# EAGLE board C2 (EAGLE 7.5.0)
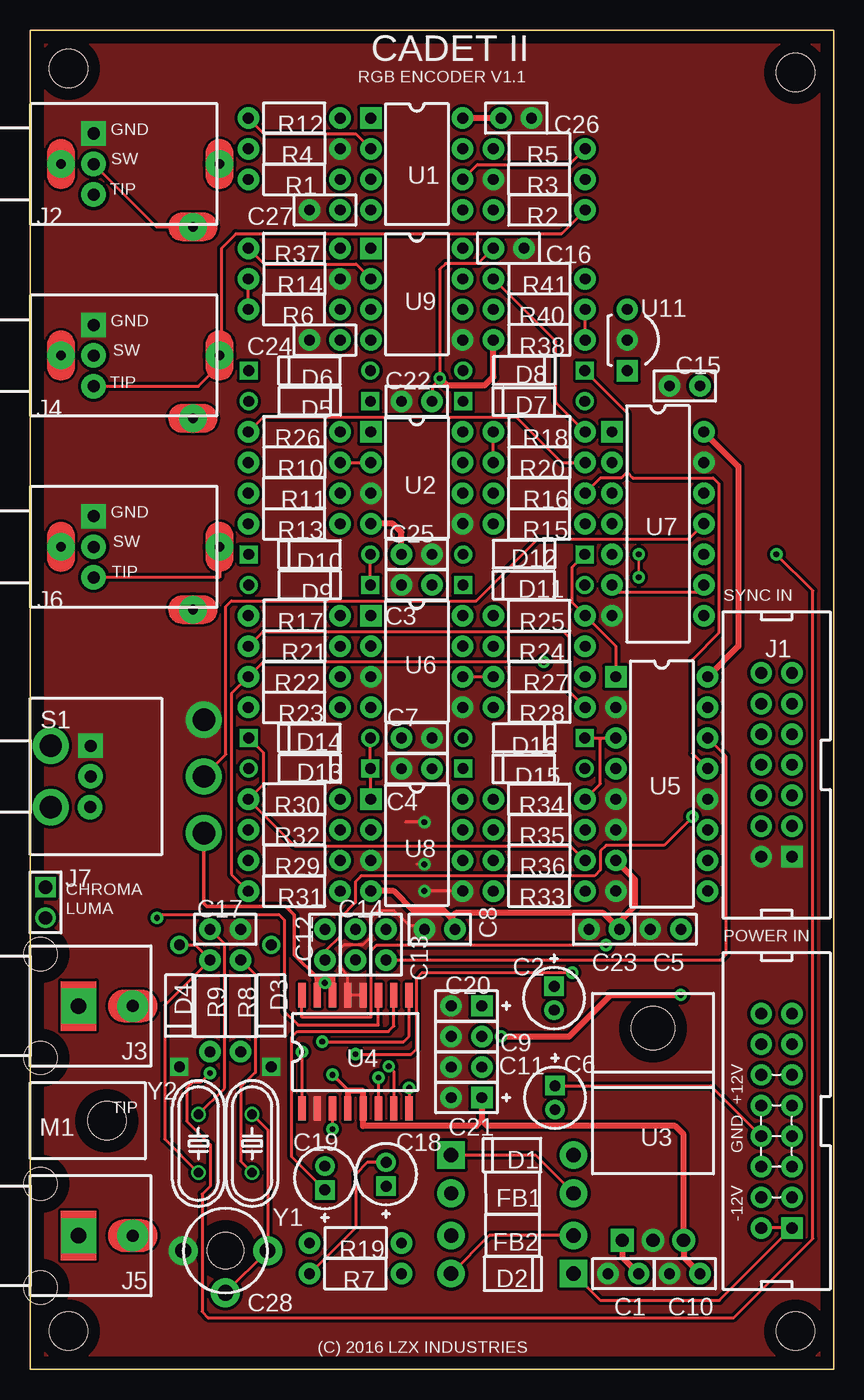
[diagram p0: board, top side]
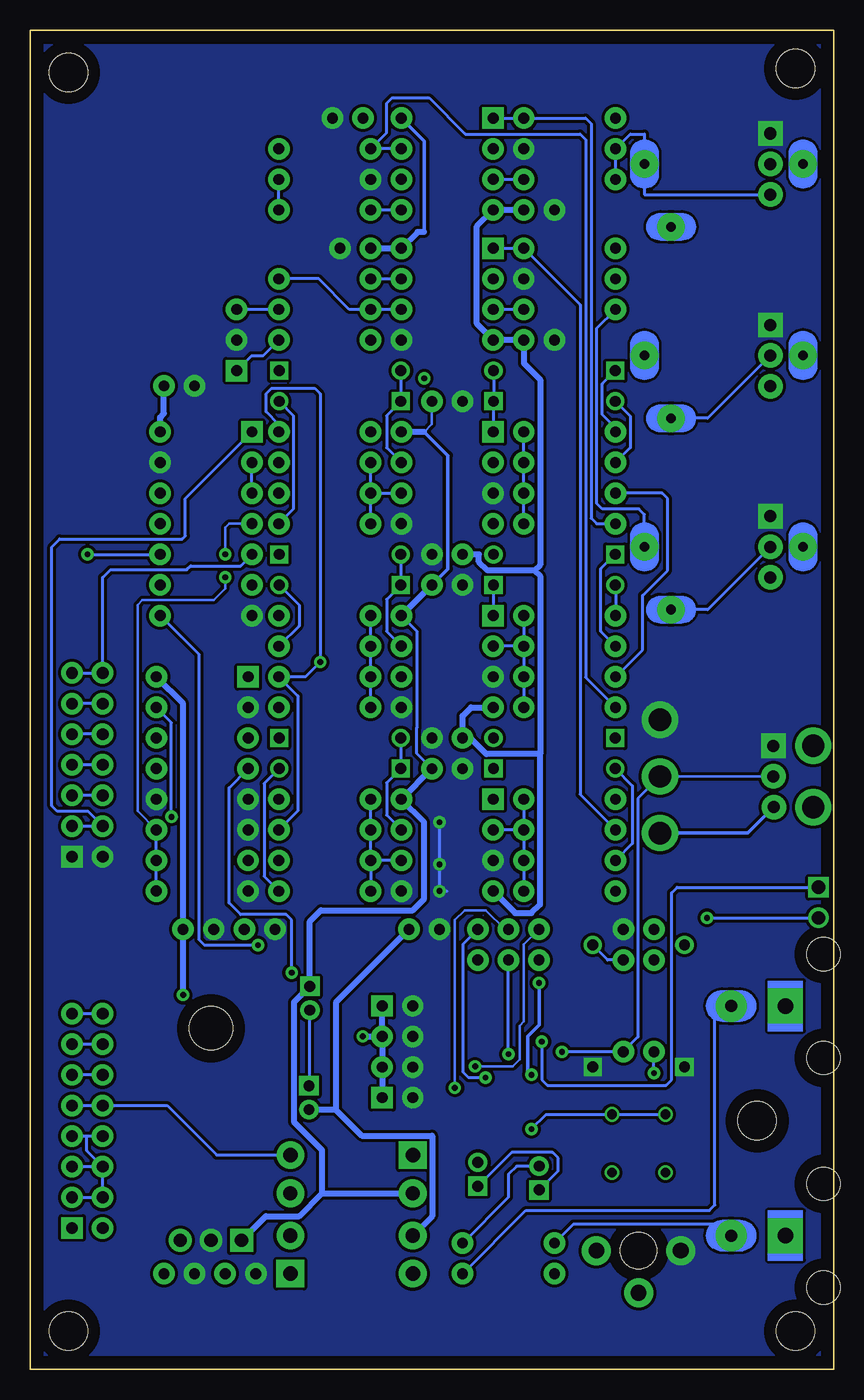
[diagram p1: board, bottom side, seen from below]

Size 66.66 x 111.12 mm. Coordinates in mm from the lower left corner, seen from the top.
Outline: 0,0 66.66,0 66.66,111.12 0,111.12 0,0
Copper layers (1*16): Top 0.035mm / dielectric 1.5mm / Bottom 0.035mm
Design rules "default *": minimum track width 10mil, minimum drill 0.61mm, track to track 8mil, track to pad 8mil, pad to pad 8mil, via to via 8mil, smd to smd 8mil, copper to edge 40mil, drill to drill 8mil, minimum pad ring 0mil, minimum via ring 8mil, stop-mask expansion 2mil, vias tented up to drill 19mil, thermal gap 10mil
Net classes: 0 Default: width 0.229 mm; 1 Power Rails: width 0.305 mm, clearance 0.178 mm, clearance 0.178 mm to class 0
Holes 3.17 mm at 3.18,3.17 3.18,107.95 63.49,3.17 63.49,107.62

## Footprints (pad centres in the part's own frame; a part is rotated, then mirrored left to right if it is on the bottom)
CAP-2.54/6.6x3 = drill 0.889 pad 1.778: 1 -1.27,0; 2 1.27,0
CAPPR-2/5.08 = drill 0.9 pad 1.6 square: 1 -0.991,0 | drill 0.9 pad 1.6: 2 0.991,0
CAP-2.54/6.6x3_C3 = drill 0.889 pad 1.778: 1 -1.27,0; 2 1.27,0
CAPPR-2/5.08_C6 = drill 0.9 pad 1.6 square: 1 -0.991,0 | drill 0.9 pad 1.6: 2 0.991,0
CAP-2.54/6.6x3_C7 = drill 0.889 pad 1.778: 1 -1.27,0; 2 1.27,0
CAP-2.54/6.6x3_C8 = drill 0.889 pad 1.778: 1 -1.27,0; 2 1.27,0
CAP-2.54/6.6x3_C9 = drill 0.889 pad 1.778: 1 -1.27,0; 2 1.27,0
CAP-2.54/6.6x3_C11 = drill 0.889 pad 1.778: 1 -1.27,0; 2 1.27,0
CAP-2.54/6.6x3_C12 = drill 0.889 pad 1.778: 1 -1.27,0; 2 1.27,0
CAP-2.54/6.6x3_C13 = drill 0.889 pad 1.778: 1 -1.27,0; 2 1.27,0
CAP-2.54/6.6x3_C14 = drill 0.889 pad 1.778: 1 -1.27,0; 2 1.27,0
CAP-2.54/6.6x3_C15 = drill 0.889 pad 1.778: 1 -1.27,0; 2 1.27,0
CAP-2.54/6.6x3_C16 = drill 0.889 pad 1.778: 1 -1.27,0; 2 1.27,0
CAP-2.54/6.6x3_C17 = drill 0.889 pad 1.778: 1 -1.27,0; 2 1.27,0
CAPPR-2/5.08_C18 = drill 0.9 pad 1.6 square: 1 -0.991,0 | drill 0.9 pad 1.6: 2 0.991,0
CAPPR-2/5.08_C19 = drill 0.9 pad 1.6 square: 1 -0.991,0 | drill 0.9 pad 1.6: 2 0.991,0
PCAP-2.54/6.6x3 = drill 0.889 pad 1.778 square: 1 -1.27,0 | drill 0.889 pad 1.778: 2 1.27,0
PCAP-2.54/6.6x3_C21 = drill 0.889 pad 1.778 square: 1 -1.27,0 | drill 0.889 pad 1.778: 2 1.27,0
CAP-2.54/6.6x3_C22 = drill 0.889 pad 1.778: 1 -1.27,0; 2 1.27,0
CAP-2.54/6.6x3_C23 = drill 0.889 pad 1.778: 1 -1.27,0; 2 1.27,0
CAP-2.54/6.6x3_C24 = drill 0.889 pad 1.778: 1 -1.27,0; 2 1.27,0
GYA22000 = drill 1.3 pad 2.4: CCW 0,3.5; CW 0,-3.5; W 3.5,0 | hole 3: 0,0
DO-41 = drill 1.2 pad 2.286 square: 1 -5.08,0 | drill 1.2 pad 2.286: 2 5.08,0
DO-41_D2 = drill 1.2 pad 2.286 square: 1 -5.08,0 | drill 1.2 pad 2.286: 2 5.08,0
DO-35 = drill 0.9 pad 1.5 square: 1 -5.05,0 | drill 0.9 pad 1.5: 2 5.05,0
DO-35_D5 = drill 0.9 pad 1.5 square: 1 -5.05,0 | drill 0.9 pad 1.5: 2 5.05,0
FB-10.16/4.45x3.5 = drill 1.194 pad 2.286: 1 -5.08,0; 2 5.08,0
IDC14M = drill 0.965 pad 1.778 square: 1 7.62,1.27 | drill 0.965 pad 1.778: 2 7.62,-1.27; 3 5.08,1.27; 4 5.08,-1.27; 5 2.54,1.27; 6 2.54,-1.27; 7 0,1.27; 8 0,-1.27; 9 -2.54,1.27; 10 -2.54,-1.27; 11 -5.08,1.27; 12 -5.08,-1.27; 13 -7.62,1.27; 14 -7.62,-1.27
PJ302M = drill 0.8 pad 2.286: 1A 2.54,0; 2A 13.487,-5.207; 3A 15.697,0 | drill 1 pad 2.032 square: 1B 5.258,2.54 | drill 1 pad 2.032: 2B 5.258,0; 3B 5.258,-2.54
RCJ-04X = drill 1.3 pad 2.9 square: 1 0,4 | drill 1 pad 2.6: 2 0,8.5 | hole 2.75: 4.3,0.85; -4.3,0.85
HDR-2x1T/2.54x2.54/3x5 = drill 1.1 pad 1.7 square: 1 0,-1.27 | drill 1.1 pad 1.7: 2 0,1.27
IDC16M = drill 0.965 pad 1.778 square: 1 8.89,1.27 | drill 0.965 pad 1.778: 2 8.89,-1.27; 3 6.35,1.27; 4 6.35,-1.27; 5 3.81,1.27; 6 3.81,-1.27; 7 1.27,1.27; 8 1.27,-1.27; 9 -1.27,1.27; 10 -1.27,-1.27; 11 -3.81,1.27; 12 -3.81,-1.27; 13 -6.35,1.27; 14 -6.35,-1.27; 15 -8.89,1.27; 16 -8.89,-1.27
KEYSTONE621 = hole 3.175: 0,6.35
RES-7.62/5.1x2.5 = drill 0.889 pad 1.778: 1 -3.81,0; 2 3.81,0
RES-7.62/5.1x2.5_R2 = drill 0.889 pad 1.778: 1 -3.81,0; 2 3.81,0
RES-7.62/5.1x2.5_R16 = drill 0.9 pad 1.778: 1 -3.81,0; 2 3.81,0
10TF230-DIY = drill 1.85 pad 3: 1 -4.7,14.4; 2 0,14.4; 3 4.7,14.4; A -2.55,1.7; B 2.55,1.7 | drill 1 pad 2.032 square: 1B -2.54,5 | drill 1 pad 2.032: 2B 0,5; 3B 2.54,4.964
DIP-8 = drill 0.9 pad 1.778 square: 1 -3.81,3.81 | drill 0.9 pad 1.778: 2 -3.81,1.27; 3 -3.81,-1.27; 4 -3.81,-3.81; 5 3.81,-3.81; 6 3.81,-1.27; 7 3.81,1.27; 8 3.81,3.81
TO-220H = drill 1.1 pad 1.9 square: 1 -2.54,0 | drill 1.1 pad 1.9: 2 0,0; 3 2.54,0 | hole 3.6: 0,17.6
SOIC-16/300mil = smd 2 x 0.6: 1 -4.7,4.445; 2 -4.7,3.175; 3 -4.7,1.905; 4 -4.7,0.635; 5 -4.7,-0.635; 6 -4.7,-1.905; 7 -4.7,-3.175; 8 -4.7,-4.445; 9 4.7,-4.445; 10 4.7,-3.175; 11 4.7,-1.905; 12 4.7,-0.635; 13 4.7,0.635; 14 4.7,1.905; 15 4.7,3.175; 16 4.7,4.445
DIP-16 = drill 0.9 pad 1.778 square: 1 -3.81,8.89 | drill 0.9 pad 1.778: 2 -3.81,6.35; 3 -3.81,3.81; 4 -3.81,1.27; 5 -3.81,-1.27; 6 -3.81,-3.81; 7 -3.81,-6.35; 8 -3.81,-8.89; 9 3.81,-8.89; 10 3.81,-6.35; 11 3.81,-3.81; 12 3.81,-1.27; 13 3.81,1.27; 14 3.81,3.81; 15 3.81,6.35; 16 3.81,8.89
DIP-8_U6 = drill 0.9 pad 1.778 square: 1 -3.81,3.81 | drill 0.9 pad 1.778: 2 -3.81,1.27; 3 -3.81,-1.27; 4 -3.81,-3.81; 5 3.81,-3.81; 6 3.81,-1.27; 7 3.81,1.27; 8 3.81,3.81
DIP-14 = drill 0.9 pad 1.778 square: 1 -3.81,7.62 | drill 0.9 pad 1.778: 2 -3.81,5.08; 3 -3.81,2.54; 4 -3.81,0; 5 -3.81,-2.54; 6 -3.81,-5.08; 7 -3.81,-7.62; 8 3.81,-7.62; 9 3.81,-5.08; 10 3.81,-2.54; 11 3.81,0; 12 3.81,2.54; 13 3.81,5.08; 14 3.81,7.62
TO-92-100R = drill 0.889 pad 1.778 square: 1 2.54,0 | drill 0.889 pad 1.778: 2 0,0; 3 -2.54,0
HC-49U = drill 0.813 pad 1.219: 1 -2.413,0; 2 2.413,0
HC-49U_Y2 = drill 0.813 pad 1.219: 1 -2.413,0; 2 2.413,0

## Placement (x,y rotation side)
C1  330n  [CAP-2.54/6.6x3]  49.21,7.94 180 top
C2  10u 25V  [CAPPR-2/5.08]  43.46,30.8 270 top
C3  100n  [CAP-2.54/6.6x3_C3]  32.07,65.09 180 top
C4  100n  [CAP-2.54/6.6x3_C3]  32.07,49.85 180 top
C5  100n  [CAP-2.54/6.6x3]  52.71,36.51 180 top
C6  10u 25V  [CAPPR-2/5.08_C6]  43.54,22.54 270 top
C7  100n  [CAP-2.54/6.6x3_C7]  32.07,52.39 180 top
C8  100n  [CAP-2.54/6.6x3_C8]  33.97,36.51 0 top
C9  1u  [CAP-2.54/6.6x3_C9]  36.2,27.62 180 top
C10  100n  [CAP-2.54/6.6x3]  54.29,7.94 180 top
C11  1u  [CAP-2.54/6.6x3_C11]  36.2,25.08 180 top
C12  100n  [CAP-2.54/6.6x3_C12]  24.45,35.24 90 top
C13  100n  [CAP-2.54/6.6x3_C13]  29.53,35.24 90 top
C14  100n  [CAP-2.54/6.6x3_C14]  26.99,35.24 90 top
C15  100n  [CAP-2.54/6.6x3_C15]  54.29,81.6 180 top
C16  100n  [CAP-2.54/6.6x3_C16]  39.69,93.03 0 top
C17  DNP  [CAP-2.54/6.6x3_C17]  16.19,36.51 0 top
C18  220uF 6.3V  [CAPPR-2/5.08_C18]  29.53,16.19 90 top
C19  220uF 6.3V  [CAPPR-2/5.08_C19]  24.45,15.87 90 top
C20  10u Tantalum  [PCAP-2.54/6.6x3]  36.2,30.16 180 top
C21  10u Tantalum  [PCAP-2.54/6.6x3_C21]  36.2,22.54 180 top
C22  100n  [CAP-2.54/6.6x3_C22]  32.07,80.33 180 top
C23  100n  [CAP-2.54/6.6x3_C23]  47.63,36.51 0 top
C24  100n  [CAP-2.54/6.6x3_C24]  24.45,85.41 0 top
C25  100n  [CAP-2.54/6.6x3_C22]  32.07,67.63 180 top
C26  100n  [CAP-2.54/6.6x3_C16]  40.32,103.82 0 top
C27  100n  [CAP-2.54/6.6x3_C24]  24.45,96.2 0 top
C28  DNP  [GYA22000]  16.19,9.85 270 top
D1  1N4001  [DO-41]  40.01,17.78 0 top
D2  1N4001  [DO-41_D2]  40.01,7.94 180 top
D3  1N4148  [DO-35]  20,30.16 90 top
D4  1N4148  [DO-35]  12.38,30.16 90 top
D5  1N5711  [DO-35_D5]  23.18,80.33 180 top
D6  1N5711  [DO-35]  23.18,82.87 0 top
D7  1N5711  [DO-35]  40.96,80.33 0 top
D8  1N5711  [DO-35_D5]  40.96,82.87 180 top
D9  1N5711  [DO-35_D5]  23.18,65.09 180 top
D10  1N5711  [DO-35]  23.18,67.63 0 top
D11  1N5711  [DO-35]  40.96,65.09 0 top
D12  1N5711  [DO-35_D5]  40.96,67.63 180 top
D13  1N5711  [DO-35_D5]  23.18,49.85 180 top
D14  1N5711  [DO-35]  23.18,52.39 0 top
D15  1N5711  [DO-35]  40.96,49.85 0 top
D16  1N5711  [DO-35_D5]  40.96,52.39 180 top
FB1  68R  [FB-10.16/4.45x3.5]  40.01,14.61 180 top
FB2  68R  [FB-10.16/4.45x3.5]  40.01,11.11 180 top
J1  LZXSYNC14  [IDC14M]  61.91,50.16 270 top
J2  3.5MM JACK  [PJ302M]  0.01,100.01 0 top
J3  RCJ-04X  [RCJ-04X]  0.01,30.15 270 top
J4  3.5MM JACK  [PJ302M]  0.01,84.12 0 top
J5  RCJ-04X  [RCJ-04X]  0.01,11.1 270 top
J6  3.5MM JACK  [PJ302M]  0.01,68.25 0 top
J7  1X2 PIN HEADER  [HDR-2x1T/2.54x2.54/3x5]  1.27,38.73 180 top
J9  2X8 PIN HEADER  [IDC16M]  61.91,20.62 270 top
M1  KEYSTONE621  [KEYSTONE621]  0.01,20.62 270 top
R1  499R  [RES-7.62/5.1x2.5]  21.91,98.74 0 top
R2  499R  [RES-7.62/5.1x2.5_R2]  42.23,96.2 180 top
R3  100K  [RES-7.62/5.1x2.5]  42.23,98.74 0 top
R4  100K  [RES-7.62/5.1x2.5_R2]  21.91,101.28 180 top
R5  1K  [RES-7.62/5.1x2.5_R2]  42.23,101.28 180 top
R6  499R  [RES-7.62/5.1x2.5]  21.91,87.95 0 top
R7  75R  [RES-7.62/5.1x2.5]  26.99,7.94 0 top
R8  10K  [RES-7.62/5.1x2.5_R2]  17.46,30.16 270 top
R9  10K  [RES-7.62/5.1x2.5_R2]  14.92,30.16 270 top
R10  1K  [RES-7.62/5.1x2.5_R2]  21.91,75.25 180 top
R11  1K  [RES-7.62/5.1x2.5]  21.91,72.71 0 top
R12  1K  [RES-7.62/5.1x2.5]  21.91,103.82 0 top
R13  1.4K  [RES-7.62/5.1x2.5]  21.91,70.17 0 top
R14  100K  [RES-7.62/5.1x2.5_R2]  21.91,90.49 180 top
R15  1K  [RES-7.62/5.1x2.5]  42.23,70.17 0 top
R16  1K  [RES-7.62/5.1x2.5_R16]  42.23,72.71 0 top
R17  1K  [RES-7.62/5.1x2.5_R2]  21.91,62.55 180 top
R18  1K  [RES-7.62/5.1x2.5_R2]  42.23,77.79 180 top
R19  75R  [RES-7.62/5.1x2.5_R2]  26.99,10.48 180 top
R20  1K  [RES-7.62/5.1x2.5_R2]  42.23,75.25 180 top
R21  1K  [RES-7.62/5.1x2.5_R2]  21.91,60.01 180 top
R22  1K  [RES-7.62/5.1x2.5]  21.91,57.47 0 top
R23  1.4K  [RES-7.62/5.1x2.5]  21.91,54.93 0 top
R24  1K  [RES-7.62/5.1x2.5]  42.23,60.01 0 top
R25  1K  [RES-7.62/5.1x2.5]  42.23,62.55 0 top
R26  1K  [RES-7.62/5.1x2.5_R2]  21.91,77.79 180 top
R27  1K  [RES-7.62/5.1x2.5_R2]  42.23,57.47 180 top
R28  1K  [RES-7.62/5.1x2.5_R2]  42.23,54.93 180 top
R29  1K  [RES-7.62/5.1x2.5_R2]  21.91,42.23 180 top
R30  1K  [RES-7.62/5.1x2.5_R2]  21.91,47.31 180 top
R31  1K  [RES-7.62/5.1x2.5]  21.91,39.69 0 top
R32  1.4K  [RES-7.62/5.1x2.5]  21.91,44.77 0 top
R33  1K  [RES-7.62/5.1x2.5]  42.23,39.69 0 top
R34  1K  [RES-7.62/5.1x2.5]  42.23,47.31 0 top
R35  1K  [RES-7.62/5.1x2.5_R2]  42.23,44.77 180 top
R36  1K  [RES-7.62/5.1x2.5_R2]  42.23,42.23 180 top
R37  1K  [RES-7.62/5.1x2.5]  21.91,93.03 0 top
R38  4.99K  [RES-7.62/5.1x2.5_R2]  42.23,85.41 180 top
R40  3.48K  [RES-7.62/5.1x2.5_R2]  42.23,87.95 180 top
R41  1K  [RES-7.62/5.1x2.5_R2]  42.23,90.49 180 top
S1  10TF230-DIY  [10TF230-DIY]  0.01,49.2 270 top
U1  LM6172  [DIP-8]  32.07,100.01 0 top
U2  LM6172  [DIP-8]  32.07,73.98 0 top
U3  7805  [TO-220H]  51.66,10.7 0 top
U4  AD724  [SOIC-16/300mil]  26.99,26.35 90 top
U5  CD4053  [DIP-16]  52.39,48.58 0 top
U6  LM6172  [DIP-8_U6]  32.07,58.74 0 top
U7  74HC14  [DIP-14]  52.07,70.17 0 top
U8  LM6172  [DIP-8_U6]  32.07,43.5 0 top
U9  LM6172  [DIP-8_U6]  32.07,89.22 0 top
U11  TL431  [TO-92-100R]  49.53,85.41 270 top
Y1  3.58MHz  [HC-49U]  18.41,18.74 90 top
Y2  4.43MHz  [HC-49U_Y2]  13.96,18.74 90 top

## Library data of the parts
C1-C28 D1 D2 J1 J3 J5 J9 M1 R1-R38 R40 R41 S1 = common
D3-D16 = common; DATASHEET: http://datasheets.diptrace.com\fairchild\1N4148.pdf; MANUFACTURER: Fairchild
FB1 FB2 = common; MANUFACTURER: Fair-Rite
J2 J4 J6 = common; DATASHEET: http://www.thonk.co.uk/shop/pj302m/
J7 = common; DATASHEET: http://datasheets.diptrace.com\con_headers\901310126_sd.pdf; MANUFACTURER: Molex
U1 U2 U6 U8 U9 = common; DATASHEET: http://datasheets.diptrace.com\ti\TL07x.pdf; MANUFACTURER: Texas Instruments
U3 = common; MANUFACTURER: Atmel
U4 = common; DATASHEET: http://datasheets.diptrace.com\analog_devices\AD724.pdf; MANUFACTURER: Analog Devices
U5 = common; DATASHEET: http://datasheets.diptrace.com\fairchild\CD4051BC.pdf; MANUFACTURER: Fairchild
U7 = common; MANUFACTURER: National Semiconductor
U11 = common; DATASHEET: http://datasheets.diptrace.com\st_micro\CD00000986.pdf; MANUFACTURER: ST Microelectronics
Y1 Y2 = common; DATASHEET: http://datasheets.diptrace.com\crystals\ECS-HC49U.pdf

## Nets
0V: C2.2 C6.1 J9.3 J9.4 J9.5 J9.6 J9.7 J9.8
+5V [Power Rails]: C5.1 C9.1 C10.1 C11.1 C15.1 C20.1 C21.1 S1.3 S1.3B U3.3 U4.4 U4.5 U4.14 U4.15 U5.16 U7.14
+12V [Power Rails]: C1.1 C2.1 C3.1 C4.1 C16.1 C22.1 C26.1 FB1.2 R38.2 U1.8 U2.8 U3.1 U6.8 U8.8 U9.8
-12V [Power Rails]: C6.2 C7.2 C8.2 C23.2 C24.2 C25.2 C27.2 FB2.2 U1.4 U2.4 U5.7 U6.4 U8.4 U9.4
BLANKING: U5.9 U5.10 U5.11 U7.4
BLUE_BLANKING: D16.1 R34.2 U5.3
CLIP_REF: R11.1 R18.1 R22.1 R27.1 R31.1 R35.1 R41.2 U9.7
CSYNC: U4.16 U7.8
GREEN_BLANKING: D12.1 R25.2 U5.1
Net_0: J5.2 R19.2
Net_1: D2.2 FB2.1
Net_2: D1.1 FB1.1
Net_3: R5.1 U1.6
Net_4: J1.13 J1.14 U7.5
Net_5: D2.1 J9.1 J9.2
Net_6: J4.3A J4.3B R2.1 R3.2
Net_7: C12.2 U4.7
Net_8: U7.6 U7.9
Net_9: J2.3A J2.3B R1.1 R4.2
Net_10: C18.1 C19.1 U4.10
Net_11: C14.1 U5.4
Net_12: R2.2 U1.5
Net_13: R12.2 R13.1 U1.1
Net_14: R24.1 R25.1 R27.2 R28.2 U6.6
Net_15: C14.2 U4.8
Net_16: R15.1 R16.1 R18.2 R20.2 U2.6
Net_17: D7.1 D8.2 U2.7
Net_18: C13.2 U4.6
Net_19: D7.2 R15.2
Net_20: D11.1 D12.2 U6.7
Net_21: R10.1 R11.2 R13.2 R26.1 U2.2
Net_22: D5.1 D6.2 U2.1
Net_23: D11.2 R24.2
Net_24: R17.1 R21.1 R22.2 R23.2 U6.2
Net_25: D9.1 D10.2 U6.1
Net_26: D9.2 R17.2
Net_27: D10.1 R21.2 R28.1
Net_28: J3.2 R7.2
Net_29: R33.1 R34.1 R35.2 R36.2 U8.6
Net_30: D15.1 D16.2 U8.7
Net_31: D15.2 R33.2
Net_32: R29.1 R30.1 R31.2 R32.2 U8.2
Net_33: D1.2 J9.9 J9.10
Net_34: D13.1 D14.2 U8.1
Net_35: D3.2 R8.1 Y1.1
Net_36: D13.2 R29.2
Net_37: D4.2 R9.1 Y2.1
Net_38: C17.1 C28.CCW C28.W U4.3 Y1.2 Y2.2
Net_39: R8.2 S1.2 S1.2B U4.1 U7.11
Net_40: R9.2 U7.10
Net_41: C12.1 U5.15
Net_42: C13.1 U5.14
Net_43: C19.2 R19.1
Net_44: C18.2 R7.1
Net_45: D5.2 R10.2
Net_46: D6.1 R20.1 R26.2
Net_47: J1.3 J1.4 U7.1
Net_48: U7.2 U7.3
Net_49: D14.1 R30.2 R36.1
Net_50: R1.2 U1.3
Net_52: R12.1 U1.2
Net_53: C1.2 C3.2 C4.2 C5.2 C7.1 C8.1 C9.2 C10.2 C11.2 C15.2 C16.2 C17.2 C20.2 C21.2 C22.2 C23.1 C24.1 C25.1 C26.2 C27.1 C28.CW D3.1 D4.1 J1.1 J1.2 J2.1A J2.1B J3.1 J4.1A J4.1B J5.1 J6.1A J6.1B R3.1 R4.1 R14.1 S1.1 S1.1B U2.3 U2.5 U3.2 U4.2 U4.12 U4.13 U5.2 U5.5 U5.6 U5.8 U5.12 U6.3 U6.5 U7.7 U7.13 U8.3 U8.5 U9.5 U11.2
Net_54: J6.3A J6.3B R6.1 R14.2
Net_61: R5.2 R23.1 U1.7
Net_62: R6.2 U9.3
Net_64: R37.1 U9.2
Net_65: R32.1 R37.2 U9.1
Net_67: R38.1 R40.1 U11.1 U11.3
Net_68: R40.2 R41.1 U9.6
Net_70: J7.1 U4.9
Net_71: J7.2 U4.11
Net_72: J1.7 J1.8
Net_73: J1.9 J1.10
Net_74: J1.11 J1.12
Net_75: J1.5 J1.6
Net_76: J2.2A J2.2B
Net_77: J4.2A J4.2B
Net_78: J6.2A J6.2B
Net_79: J9.11 J9.12
Net_80: J9.13 J9.14
Net_81: J9.15 J9.16
RED_BLANKING: D8.1 R16.2 U5.13

## Tracks (layer width: path | path; a pad name or v marks a point on that pad's centre or on a via)
0V
  Top 0.254: C6.1 56.46,23.53 J9.8
  Bottom 0.254: J9.3 J9.4 J9.6 | J9.6 61.96,18.14 61.96,19.35 | 61.96,19.35 J9.7 | J9.6 J9.5 | J9.8 61.96,19.35 | C6.1 43.46,23.61 C2.2
+5V  (via drill 0.48 pad 1.02)
  Top 0.305: S1.3 14.41,38.67 14.67,38.42 21.2,38.42 21.91,37.71 21.91,34.41 23.81,32.51 | U4.4 26.35,23.18 v25.08,24.45 | v24.45,32.07 24.45,32.36 24.3,32.51
  Top 0.508: C10.1 54.2,9.3 U3.3 54.2,19.48 53.49,20.19 37.92,20.19 37.47,20.65 | 37.47,20.65 37.01,20.19 27.62,20.19 U4.5 27.62,23.11 26.35,23.11 U4.4 | U7.14 58.74,74.93 58.74,60.01 U5.16 | v39.07,27.62 44.72,27.62 48.16,31.06 v53.98,31.06 | C21.1 37.47,20.65 | U4.14 25.08,32.51 24.3,32.51 23.81,32.51 U4.15
  Bottom 0.305: S1.3 7.14,44.5 S1.3B | v25.08,24.45 25.4,24.76 25.4,27.62 24.45,28.57 v24.45,32.07
  Bottom 0.508: v39.07,27.62 C9.1 | v53.98,31.06 C5.1 53.98,55.24 U5.16 | U7.14 55.88,79 55.56,79.31 C15.1 | C9.1 C20.1 | C21.1 C11.1 C9.1
+12V  (via drill 0.48 pad 1.02)
  Top 0.229: C16.1 37.15,91.76 34.46,91.76 33.97,91.28 v33.97,82.23
  Top 0.254: v33.97,82.23 33.97,82.18 33.34,81.55 C22.1
  Top 0.508: U3.1 49.12,9.3 C1.1 | C26.1 U1.8 | U1.8 | v33.97,82.23 34.55,81.66 37.71,81.66 38.42,82.37 R38.2
  Bottom 0.203: C22.1 33.34,78.42 33.97,77.79 | 33.97,77.79
  Bottom 0.254: C4.1 34.61,51.12 34.61,53.24 34.56,53.24 34.56,61.23 U6.8
  Bottom 0.305: U1.8 33.97,101.92 33.97,94.37 | C3.1 32.02,66.41 32.02,75.83 33.97,77.79
  Bottom 0.508: C4.1 U8.8 | U8.8 | U8.8 33.97,45.4 33.97,39.05 34.93,38.1 42.55,38.1 43.46,37.19 C2.1 44.79,30.45 44.79,20.55 42.46,18.21 42.46,14.61 | 42.46,14.61 37.95,14.61 | 37.95,14.61 | 37.95,14.61 FB1.2 | U3.1 47.11,12.71 44.35,12.71 42.46,14.61 | C3.1 U6.8 | U6.8 | C16.1 U9.8 34.53,94.37 33.97,94.37 | 33.97,77.79 U2.8
-12V
  Top 0.508: U5.7 50.16,40.64 50.16,38.42 48.89,37.15 C23.2 47.55,37.86 35.32,37.86 34.93,37.46 34.93,36.51 C8.2 35.88,36.51 34.29,38.1 31.75,38.1 30.16,39.69 U8.4 | C25.2 30.8,69.46 30.09,70.17 U2.4
  Bottom 0.508: C27.2 U1.4 | U1.4 | U9.4 C24.2 25.72,83.49 24.37,82.15 24.37,66.75 24.83,66.3 | U9.4 | C8.2 41.31,30.44 41.31,21.55 | 41.31,21.55 39.14,19.38 33.33,19.38 33.33,12.71 FB2.2 | U8.4 26.43,37.86 25.08,37.86 24.37,38.57 24.37,51.05 | 24.37,51.05 28.83,51.05 30.16,52.39 C7.2 30.8,54.22 30.09,54.93 U6.4 | 24.83,66.3 28.72,66.3 29.43,67.01 29.43,67.63 C25.2 | 24.83,66.3 24.37,65.84 24.37,51.05 | U9.4 29.6,86.75 29.6,94.86 U1.4 | 41.31,21.55 | 41.31,21.55 C6.2
BLANKING  (via drill 0.48 pad 1.02)
  Top 0.203: v50.48,67.63 v50.48,65.72
  Bottom 0.203: 49.21,70.17 U7.4 50.16,70.17 50.48,69.85 v50.48,67.63 | v50.48,65.72 50.48,64.77 51.44,63.82 57.35,63.82 57.75,63.42 57.75,46.32 U5.11
  Bottom 0.254: U5.9 U5.10 U5.11
BLUE_BLANKING
  Top 0.254: D16.1 47.46,52.39 | 47.46,52.39 U5.3 | R34.2 47.31,48.58 47.31,52.24 47.46,52.39
CLIP_REF  (via drill 0.48 pad 1.02)
  Top 0.254: R18.1 43.6,80.22 43.6,85.3 R41.2 | v42.61,58.69 19.32,58.69 R22.1 16.7,56.07 16.7,41.09 R31.1
  Bottom 0.254: R18.1 46.04,78.41 47.09,79.46 47.09,80.95 46.63,81.41 43.07,81.41 42.61,80.95 v42.61,58.69 43.83,57.47 R27.1 44.46,55.89 44.46,46.34 R35.1 | R41.2 U9.7 | R22.1 15.86,59.7 15.86,64.21 13.78,66.29 13.78,72.25 14.24,72.71 R11.1
CSYNC  (via drill 0.48 pad 1.02)
  Top 0.254: v47.76,35.19 28.71,35.19 28.25,34.73 28.25,29.21 22.54,29.21 U4.16
  Bottom 0.254: v47.76,35.19 52.2,35.19 52.66,35.65 52.66,59.32 U7.8
GREEN_BLANKING
  Top 0.254: D12.1 44.93,66.55 44.93,63.66 45.72,62.86 46.04,62.86 R25.2 48.58,60.01 U5.1
Net_0
  Bottom 0.254: R19.2 21.59,12.06 8.51,12.06 J5.2
Net_1
  Top 0.254: FB2.1 38.1,11.11 D2.2
Net_2
  Top 0.254: D1.1 41.91,17.78 FB1.1
Net_3
  Top 0.254: U1.6 37.1,99.96 44.72,99.96 R5.1
Net_4
  Bottom 0.254: J1.13 J1.14 60.64,65.71 60,66.36 53.66,66.36 53.34,66.67 49.21,66.67 U7.5
Net_5
  Top 0.254: J9.2 J9.1 57.16,5.71 47.31,5.71 D2.1
Net_6
  Top 0.254: J4.3B 13.96,81.59 15.71,83.34 | 15.71,83.34 J4.3A 15.71,83.34 | 15.71,83.34 15.88,83.5 15.88,93.03 17.09,94.25 44.08,94.25 R2.1
  Bottom 0.254: R2.1 R3.2
Net_7  (via drill 0.48 pad 1.02)
  Top 0.254: v29.75,25.13 30.16,24.73 U4.7
  Bottom 0.203: v29.75,25.13 26.62,25.13 26.04,25.72 26.04,28.5 25.72,28.89 25.72,35.24 C12.2
Net_8
  Top 0.254: U7.9 55.88,64.45 48.26,64.45 U7.6
Net_9
  Bottom 0.254: R1.1 R4.2 16.88,102.5 15.71,102.5 J2.3A 15.71,97.47 J2.3B
Net_10
  Top 0.254: C19.1 21.7,17.63 21.7,27.57 22.16,28.03 29.71,28.03 30.16,28.49 U4.10
  Bottom 0.254: C19.1 22.86,16.47 22.86,17.54 23.32,18 26.73,18 C18.1
Net_11  (via drill 0.48 pad 1.02)
  Top 0.254: v26.99,26.15 31.61,26.15 32.06,26.61 32.06,32.46 32.52,32.92 v44.97,32.92
  Bottom 0.254: v44.97,32.92 44.97,37.27 45.43,37.73 49.2,37.73 50.16,38.7 50.16,48.26 U5.4 | v26.99,26.15 C14.1
Net_12
  Bottom 0.254: U1.5 R2.2
Net_13
  Bottom 0.254: U1.1 R12.2 | R12.2 | R12.2 20.58,103.82 20.12,103.36 20.12,70.62 19.66,70.17 R13.1
Net_14
  Top 0.254: R27.2 U6.6
  Bottom 0.254: R28.2 R27.2 R24.1 R25.1
Net_15  (via drill 0.48 pad 1.02)
  Top 0.254: v31.43,23.36 U4.8
  Bottom 0.203: v31.43,23.36 31.43,37.3 30.63,38.1 28.86,38.1 27.27,36.51 C14.2
Net_16
  Top 0.254: R20.2 R18.2
  Bottom 0.254: R15.1 R16.1 | R16.1 U2.6 | R16.1 R20.2
Net_17
  Bottom 0.254: D8.2 D7.1 37.1,79.14 37.1,76.47 U2.7
Net_18  (via drill 0.48 pad 1.02)
  Top 0.254: v28.89,24.2 U4.6
  Bottom 0.254: v28.89,24.2 30.29,24.2 30.75,24.66 30.75,35.29 C13.2
Net_19
  Bottom 0.254: D7.2 44.82,79.14 44.82,71.39 R15.2
Net_20
  Bottom 0.254: D12.2 D11.1 37.1,63.9 37.1,61.23 U6.7
Net_21
  Top 0.254: R10.1 U2.2
  Bottom 0.254: R13.2 R11.2 R10.1 R26.1
Net_22
  Bottom 0.254: D6.2 D5.1 28.26,80.3 U2.1
Net_23
  Bottom 0.254: D11.2 44.36,63.44 44.36,61.68 R24.2
Net_24
  Bottom 0.254: R17.1 R21.1 | R21.1 R22.2 R23.2 | R21.1 U6.2
Net_25
  Top 0.254: D9.1 D10.2
  Bottom 0.254: D9.1 28.26,65.06 U6.1
Net_26
  Bottom 0.254: D9.2 18.1,65.06 R17.2
Net_27
  Top 0.254: R21.2 19.32,61.23 44.21,61.23 44.67,60.77 44.67,56.3 R28.1
  Bottom 0.254: R21.2 19.32,61.23 19.32,66.44 D10.1
Net_28
  Bottom 0.254: R7.2 25.55,13.19 10.33,13.19 9.87,13.64 9.87,29.5 8.51,30.86 J3.2
Net_29
  Bottom 0.254: U8.6 R36.2 | R36.2 R33.1 | R34.1 R35.2 R36.2
Net_30
  Bottom 0.254: D16.2 D15.1 37.1,48.66 37.1,45.99 U8.7
Net_31
  Bottom 0.254: D15.2 47.26,48.6 47.26,40.91 R33.2
Net_32
  Bottom 0.254: R30.1 R32.2 | R32.2 R29.1 R31.2 | R32.2 U8.2
Net_33
  Bottom 0.254: J9.9 J9.10 55.31,21.89 51.2,17.78 D1.2
Net_34
  Top 0.254: U8.1 28.26,49.82 D13.1 D14.2
Net_35
  Top 0.254: R8.1 18.68,32.75 18.68,24.64 17.47,23.42 17.47,17.27 Y1.1
  Bottom 0.254: R8.1 18.76,33.97 D3.2
Net_36
  Bottom 0.254: D13.2 16.7,48.42 16.7,43.62 R29.2
Net_37
  Top 0.254: D4.2 13.68,35.21 R9.1 11.16,30.21 11.16,19.13 Y2.1
Net_38  (via drill 0.48 pad 1.02)
  Top 0.254: C28.W C28.CCW 19.69,19.87 Y1.2 | Y2.2 16.14,23.33 16.14,35.29 C17.1 | v25.08,19.94 U4.3
  Bottom 0.254: v25.08,19.94 23.87,21.15 Y1.2 Y2.2
Net_39  (via drill 0.48 pad 1.02)
  Top 0.254: S1.2 16.24,51.03 16.24,63.31 16.7,63.77 36.99,63.77 42.12,68.9 54.61,68.9 U7.11 | v22.54,26.35 U4.1
  Bottom 0.203: S1.2 S1.2B
  Bottom 0.254: S1.2 16.24,47.37 16.24,27.57 R8.2 v22.54,26.35
Net_40  (via drill 0.48 pad 1.02)
  Top 0.229: v14.92,24.58 14.17,23.83 13.47,23.83 12.98,23.34 12.98,20.6 14.94,18.64 14.94,15.21 14.26,14.53 14.26,4.78 14.74,4.3 58.38,4.3 64.92,10.84 64.92,64.6 v61.9,67.63
  Bottom 0.229: v61.9,67.63 U7.10 | v14.92,24.58 R9.2
Net_41  (via drill 0.48 pad 1.02)
  Top 0.229: v54.94,45.85 52.58,43.48 47.78,43.48 47.3,43 47.3,41.43 46.81,40.95 27.46,40.95 26.98,40.46 26.98,38.73 25.7,37.46 25.7,35.92 24.45,34.66 C12.1
  Bottom 0.254: v54.94,45.85 54.94,53.67 U5.15
Net_42
  Top 0.254: C13.1 57.28,33.97 57.73,34.43 57.73,50.85 U5.14
Net_43
  Bottom 0.254: C19.2 26.31,16.87 26.99,16.19 26.99,14.29 R19.1
Net_44
  Top 0.254: C18.2 27.98,17.18 26.99,16.19 26.99,11.75 R7.1
Net_45
  Bottom 0.254: D5.2 16.88,79.08 16.88,76.47 R10.2
Net_46
  Top 0.254: R26.2 19.32,79.01 40.33,79.01 44.09,75.25 R20.1
  Bottom 0.254: R26.2 18.1,78.1 19.21,79.22 19.21,81.79 D6.1
Net_47
  Bottom 0.254: J1.3 J1.4 61.86,46.3 64.4,46.3 64.86,46.76 64.86,68.25 64.21,68.9 54.05,68.9 53.78,69.16 53.78,72.26 U7.1
Net_48
  Bottom 0.254: U7.3 U7.2
Net_49
  Top 0.254: D14.1 19.32,51.2 19.32,48.53 R30.2 21.96,43.45 44.82,43.45 R36.1
Net_50
  Bottom 0.254: U1.3 R1.2
Net_52
  Top 0.254: U1.2 27.04,102.5 19.42,102.5 R12.1
Net_53  (via drill 0.48 pad 1.02)
  Top 0.229: U8.5 v32.7,39.69 | v32.7,41.91 32.07,41.91 | v32.7,45.4 31.11,45.4 | U4.12 U4.13 26.35,32.7 25.72,33.34 25.72,34.92 26.04,35.24 27.62,35.24 28.26,35.88 28.26,37.46 28.89,38.1 30.16,38.1 31.43,36.83 32.38,36.83 C8.1
  Bottom 0.229: 32.07,39.69 v32.7,39.69 v32.7,41.91 v32.7,45.4
  pour Top (isolate 0.254): 0.61,0.61 66.05,0.61 66.05,110.52 0.61,110.52
  pour Bottom (isolate 0.254): 0.6,0.6 66.07,0.6 66.07,110.53 0.6,110.53
Net_54
  Top 0.254: J6.3A 15.71,65.71 J6.3B | R6.1 R14.2
  Bottom 0.254: J6.3A 15.71,70.93 16.17,71.39 19.21,71.39 19.66,71.84 19.66,86.38 R6.1
Net_61
  Bottom 0.254: U1.7 R5.2 37.1,102.6 37.1,105.04 36.64,105.5 33.57,105.5 30.57,102.5 21.04,102.5 20.58,102.04 20.58,57.41 R23.1
Net_62
  Bottom 0.254: R6.2 U9.3
Net_64
  Top 0.254: R37.1 19.42,91.71 27.04,91.71 U9.2
Net_65
  Bottom 0.254: U9.1 R37.2 21.04,88.35 21.04,47.71 R32.1
Net_67
  Top 0.254: R38.1 R40.1
  Bottom 0.254: R38.1 47.36,84.09 48.31,84.09 U11.1 | R40.1 U11.3
Net_68
  Bottom 0.254: U9.6 R40.2 40.18,87.95 42.72,90.49 R41.1
Net_70  (via drill 0.48 pad 1.02)
  Top 0.254: v24.22,27.19 30.98,27.19 31.43,27.65 U4.9
  Bottom 0.254: v24.22,27.19 24.22,24.03 23.76,23.57 13.92,23.57 13.46,24.03 13.46,39.55 13.01,40 J7.1
Net_71  (via drill 0.48 pad 1.02)
  Top 0.254: v10.53,37.46 10.79,37.73 20.63,37.73 21.08,37.27 21.08,29.72 22.23,28.57 28.89,28.57 U4.11
  Bottom 0.254: v10.53,37.46 J7.2
Net_72
  Bottom 0.254: J1.8 J1.7
Net_73
  Bottom 0.254: J1.10 J1.9
Net_74
  Bottom 0.254: J1.12 J1.11
Net_75
  Bottom 0.254: J1.6 J1.5
Net_76
  Top 0.254: J2.2B 10.48,94.81 J2.2A
Net_77
  Bottom 0.254: J4.2B 10.48,78.92 J4.2A
Net_78
  Bottom 0.254: J6.2B 10.48,63.04 J6.2A
Net_79
  Bottom 0.254: J9.12 J9.11
Net_80
  Bottom 0.254: J9.14 J9.13
Net_81
  Bottom 0.254: J9.16 J9.15
RED_BLANKING
  Top 0.229: D8.1 49.52,79.36 49.52,74.45 | 49.52,74.45 50,73.97 56.66,73.97 57.14,73.48 57.14,61.12 54.94,58.92 54.94,51.1 U5.13 | 49.52,74.45 49.03,73.97 47.3,73.97 R16.2

## Text on the board
tPlace: CADET II | RGB ENCODER V1.1 | GND | R12 | C26 | SW | R4 | R5 | TIP | U1 | R1 | R3 | J2 | C27 | R2 | R37 | C16 | R14 | R41 | GND | U9 | U11 | R6 | R40 | SW | C24 | R38 | TIP | C15 | D6 | C22 | D8 | J4 | D5 | D7 | R26 | R18 | R10 | R20 | U2 | GND | R11 | R16 | SW | R13 | R15 | U7 | C25 | TIP | D10 | D12 | D11 | SYNC IN | J6 | D9 | R17 | C3 | R25 | J1 | R21 | R24 | U6 | R22 | R27 | S1 | R23 | C7 | R28 | D14 | D16 | D13 | D15 | U5 | R30 | C4 | R34 | R32 | R35 | U8 | R29 | R36 | J7 | CHROMA | LUMA | R31 | R33 | C17 | C14 | POWER IN | C8 | C12 | C23 | C5 | C13 | C2 | C20 | D4 | R9 | R8 | D3 | C9 | J3 | U4 | C11 | C6 | TIP | Y2 | +12V | M1 | C21 | C19 | C18 | U3 | GND | D1 | FB1 | Y1 | -12V | R19 | FB2 | J5 | R7 | D2 | C28 | C1 | C10 | (C) 2016 LZX INDUSTRIES
tDocu: R12 | C26 | R4 | R5 | U1 | R1 | R3 | J2 | C27 | R2 | R37 | C16 | R14 | R41 | U9 | U11 | R6 | R40 | C24 | R38 | C15 | D6 | C22 | D8 | J4 | D5 | D7 | R26 | R18 | R10 | R20 | U2 | R11 | R16 | R13 | R15 | U7 | C25 | D10 | D12 | D11 | J6 | D9 | R17 | C3 | R25 | J1 | R21 | R24 | U6 | R22 | R27 | S1 | R23 | C7 | R28 | D14 | D16 | D13 | D15 | U5 | R30 | C4 | R34 | R32 | R35 | U8 | R29 | R36 | J7 | R31 | R33 | C17 | C14 | C8 | C12 | C23 | C5 | C13 | C2 | C20 | D4 | R9 | R8 | D3 | C9 | J3 | U4 | C11 | C6 | Y2 | M1 | C21 | C19 | C18 | U3 | D1 | FB1 | Y1 | R19 | FB2 | J5 | R7 | D2 | C28 | C1 | C10